# Altium PCB Remote_Control.PcbDoc
Units mm, origin at the board's own origin, x right, y up, seen from the top; angles counter-clockwise.
Board outline 97.54 x 94.25 mm, 2 copper layers (Top Layer, Bottom Layer); 73 components, 70 nets, 292 pads, 193 vias.
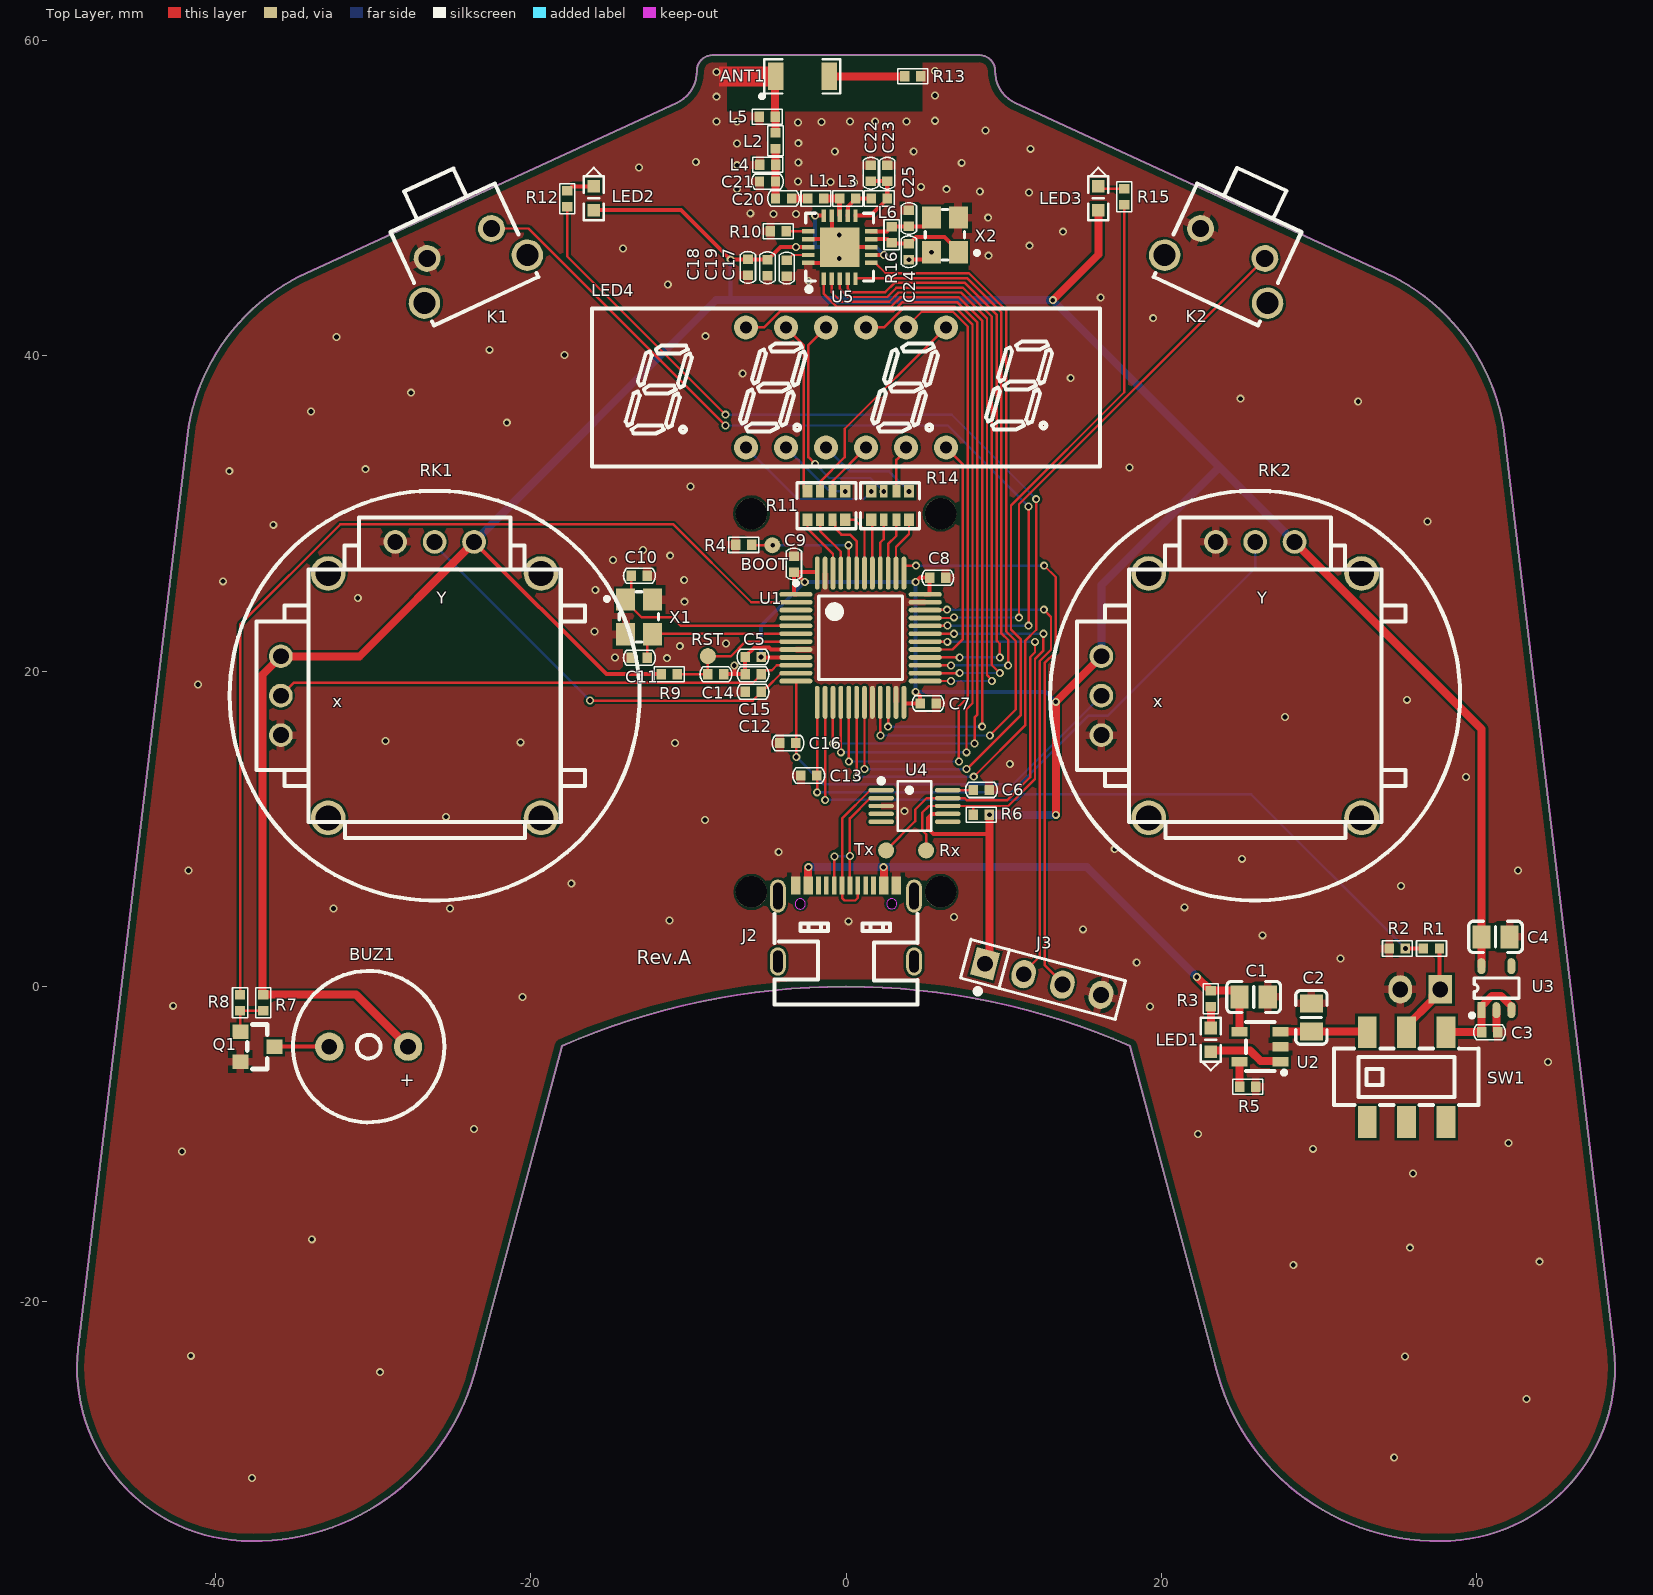
[diagram p0: Top Layer view]
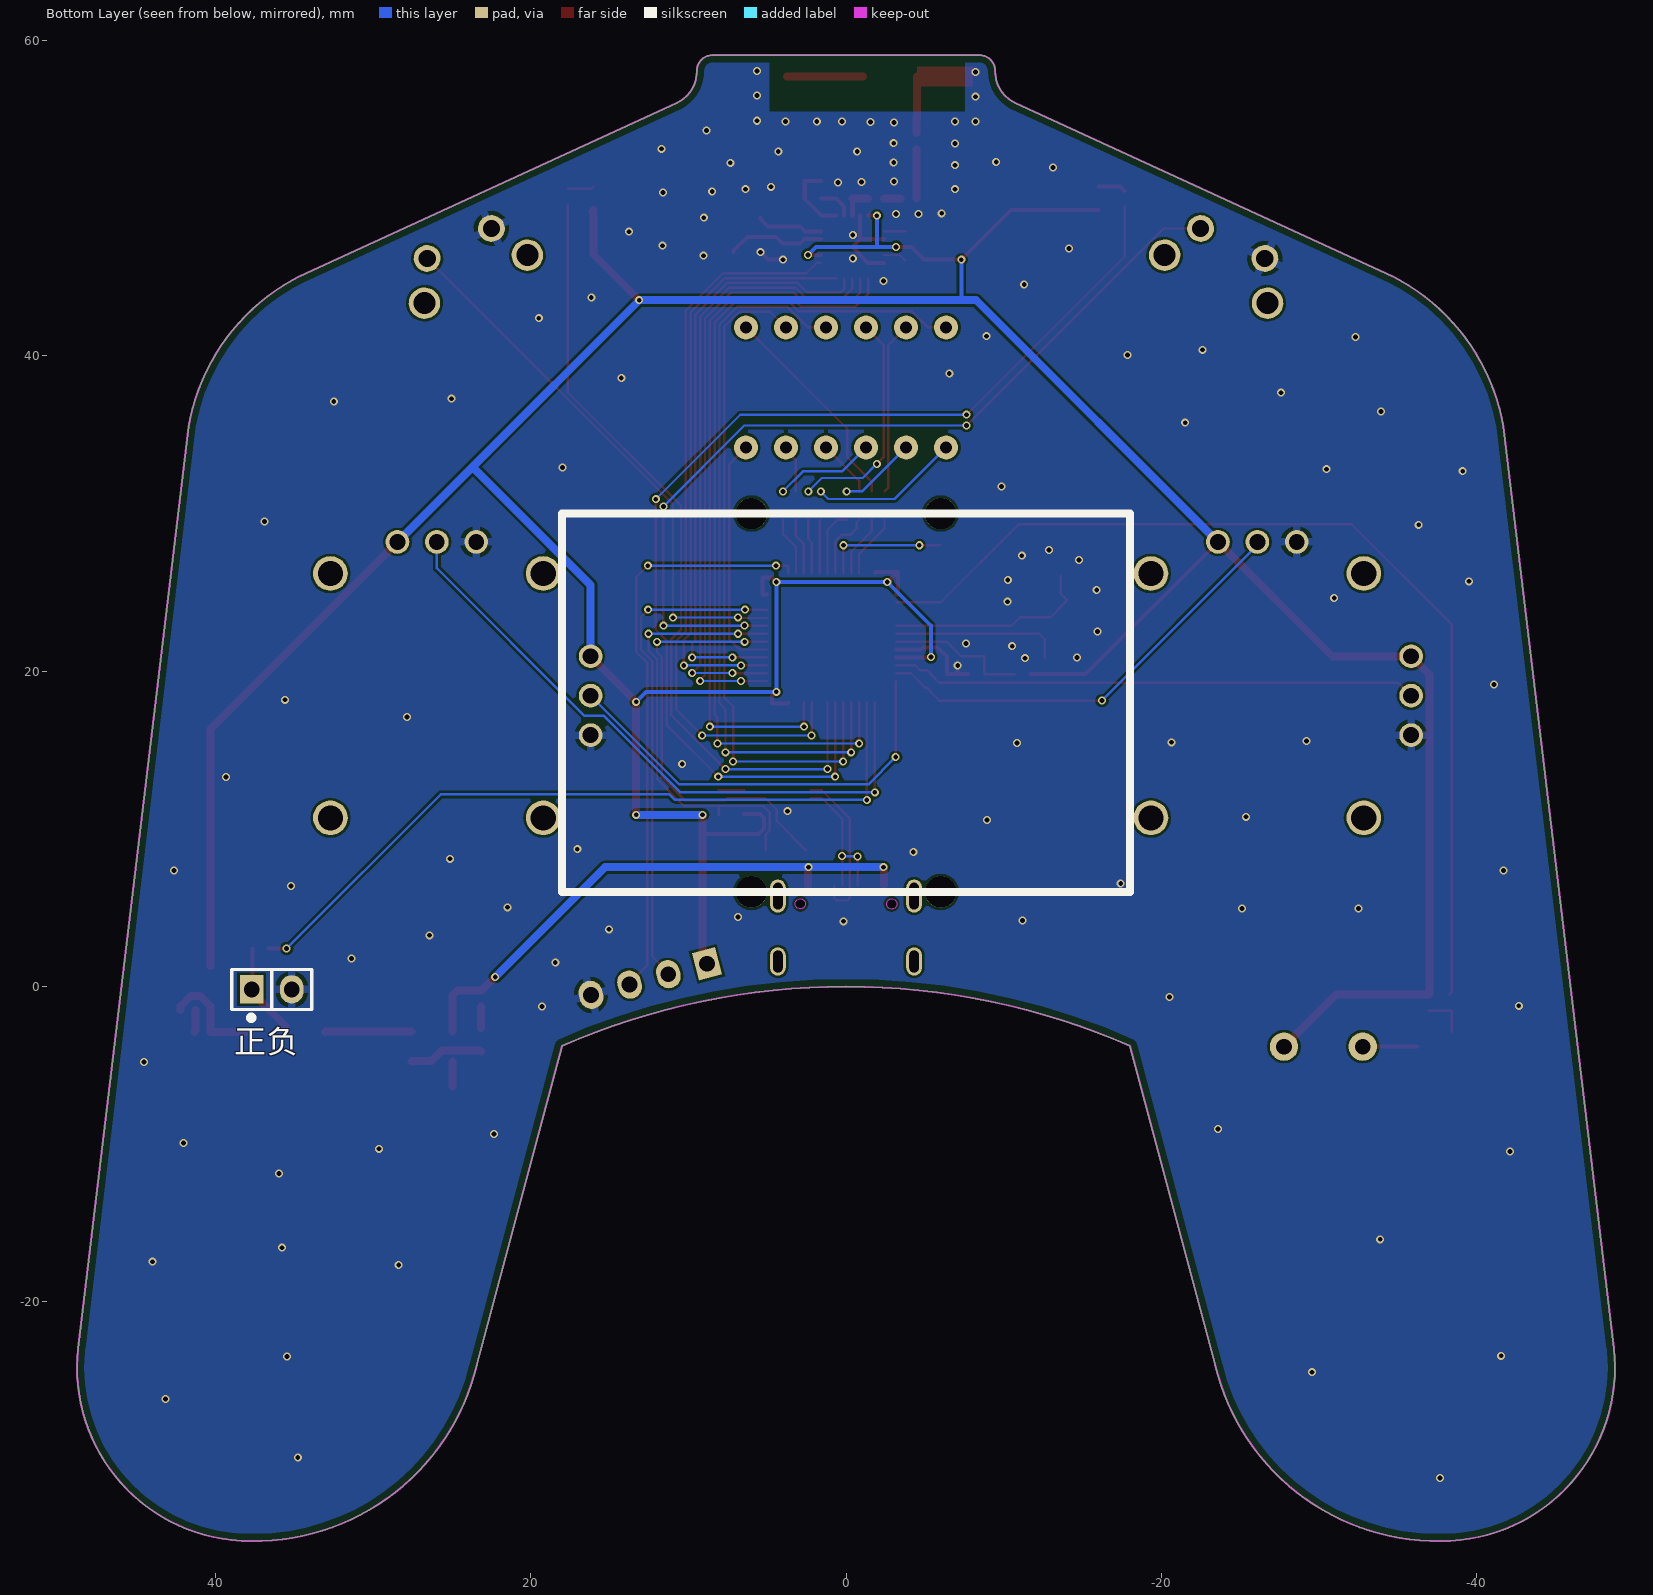
[diagram p1: Bottom Layer view, seen from below]

## Layer stack, top to bottom
Top Solder: solder mask 0.0102, Solder Resist, Dk 3.5
Top Layer: signal copper 0.0356
Dielectric 1: dielectric 0.32, FR-4, Dk 4.8
Bottom Layer: signal copper 0.0356
Bottom Solder: solder mask 0.0102, Solder Resist, Dk 3.5

## Board outline
-48.701,-22.94 ccw(c-37.77,-24.17) -39,-35.1 ccw(c-37.55,-20.65) -23.418,-23.996 -23.419,-23.996 -18.006,-3.759 cw(c0,-45) 0,0 cw(c0,-45) 18.006,-3.759 23.419,-23.996 23.418,-23.996 ccw(c37.55,-20.65) 39,-35.1 ccw(c37.77,-24.17) 48.701,-22.94 41.7,35.5 ccw(c28.65,33.25) 34.631,45.065 34.63,45.062 10.746,56.036 cw(c11.684,58.055) 9.458,58.08 ccw(c8.458,58.08) 8.458,59.08 -8.458,59.08 ccw(c-8.458,58.08) -9.458,58.08 cw(c-11.684,58.055) -10.746,56.036 -34.63,45.062 -34.631,45.065 ccw(c-28.65,33.25) -41.7,35.5

## Design rules (kind name [scope] priority, off if disabled: settings)
Clearance Keep-Out [OnLayer('Keep-Out Layer')] p1: gap=0.4 ignorepadtopadclearanceinfootprint=FALSE except(0: Arc-Hole Track-Hole SMDPad-Hole THPad-Hole Via-Hole Fill-Hole Poly-Hole Region-Hole Text-Hole)
Clearance [All] p2: gap=0.152 ignorepadtopadclearanceinfootprint=FALSE except(0: Arc-Hole Track-Hole SMDPad-Hole THPad-Hole Via-Hole Fill-Hole Poly-Hole Region-Hole Text-Hole)
ComponentClearance [All] p1: gap=0 collisioncheckmode=3 verticalgap=0 showdistances=FALSE
Height [All] p1: minheight=0 maxheight=100 prefheight=12.7
HoleSize [All] p1: absolutevalues=TRUE maxlimit=5.08 minlimit=0.025 maxpercent=80.000 minpercent=20.000
HoleToHoleClearance [All] p1: gap=0 allowstackedmicrovias=TRUE
MinimumSolderMaskSliver [All] p1: minsoldermaskwidth=0
PolygonConnect PolygonConnect_2 [IsVia or  HasPad('R13-2')] p1: connectstyle=Direct reliefconductorwidth=0.254 reliefentries=4 polygonreliefangle="90 Angle" airgapwidth=0.254
PolygonConnect PolygonConnect_1 [All] p2: connectstyle=Relief reliefconductorwidth=0.508 reliefentries=4 polygonreliefangle="90 Angle" airgapwidth=0.254
RoutingVias [All] p1: holewidth=0.305 width=0.508 viastyle="Through Hole" minholewidth=0.305 minwidth=0.406 maxholewidth=0.711 maxwidth=1.27
SilkToSilkClearance [All] p1: silktosilkclearance=0
SilkToSolderMaskClearance [IsPad] p1: minsilkscreentomaskgap=0 clearancetoexposedcopper=TRUE
SolderMaskExpansion [All] p1: expansion=0.102
Width [All] p1: maxlimit=2.54 minlimit=0.152 preferedwidth=0.152
23 further rules are at their usual default settings.

## Components (designator, comment, footprint, x,y, rotation, side; value= is the part's Value field where it differs from the comment)
ANT1 "CrossAir Antenna" ANT-SMD_L3.1-W1.6 -2.769,57.734 r0 top
BOOT "BOOT" PAD-40 -4.674,27.991 r0 top
BUZ1 "BUZZER" BUZ-TH_BD9.6-P5.00-D0.7-FD -30.277,-3.81 r180 top
C1 "10uF" 0805C 25.857,-0.66 r0 top
C2 "10uF" 0805C 29.515,-1.956 r90 top
C3 "104" 0402C 40.818,-2.896 r0 top
C4 "10uF" 0805C 41.199,3.15 r0 top
C5 "104" 0402C -5.893,20.904 r0 top
C6 "104" 0402C 8.585,12.471 r0 top
C7 "104" 0402C 5.207,17.958 r180 top
C8 "104" 0402C 5.817,25.933 r180 top
C9 "104" 0402C -3.302,26.797 r270 top
C10 "20pF" 0402C -13.106,26.06 r180 top
C11 "20pF" 0402C -13.106,20.853 r0 top
C12 "104" 0402C -5.893,18.694 r0 top
C13 "104" 0402C -2.362,13.386 r0 top
C14 "104" 0402C -8.255,19.812 r180 top
C15 "104" 0402C -5.893,19.812 r0 top
C16 "104" 0402C -3.683,15.443 r0 top
C17 "33nF" 0402C -3.759,45.568 r90 top
C18 "10nF" 0402C -6.223,45.618 r270 top
C19 "1nF" 0402C -4.978,45.593 r270 top
C20 "1.5pF" 0402C -3.962,49.987 r180 top
C21 "1.0pF" 0402C -4.978,51.054 r0 top
C22 "2.2nF" 0402C 1.575,51.587 r90 top
C23 "4.7pF" 0402C 2.616,51.587 r90 top
C24 "20pF" 0402C 3.988,46.609 r90 top
C25 "20pF" 0402C 3.988,48.717 r270 top
J2 "Type-C" USB-C-SMD_TYPE-C-16P-1 0,4 r0 top
J3 "CON4" SIP-4-2.54 12.497,0.457 r345 top
K1 "BUTTON" KEY-TH_4P-L7.5-W6.8-P4.50-LS7.2 -24,46 r205 top
K2 "BUTTON" KEY-TH_4P-L7.5-W6.8-P4.50-LS7.2 24,46 r155 top
L1 "3.9nH" 0402R -1.905,49.987 r180 top
L2 "3nH" 0402R -4.47,53.645 r90 top
L3 "8.2nH" 0402R 0.102,49.987 r180 top
L4 "NC" 0402R -4.97,52.121 r0 top
L5 "NC" 0402R -5.004,55.169 r0 top
L6 "2.7nH" 0402R 2.108,49.987 r0 top
LED1 "Red" LED-0603 23.139,-3.378 r270 top value=0603Red,SMD
LED2 "Blue" LED-0603 -16,50 r90 top value=0603Red,SMD
LED3 "Blue" LED-0603 16,50 r90 top value=0603Red,SMD
LED4 "Numerical code tube" 0.28寸四位共阴数码管 0,38 r0 top
Q1 "MMBT3904" SOT-23 -37.338,-3.81 r0 top
R1 "3.6k" 0402R 37.135,2.413 r0 top
R2 "10k" 0402R 34.976,2.413 r0 top
R3 "1k" 0402R 23.139,-0.762 r90 top
R4 "10k" 0402R -6.477,28.016 r180 top
R5 "2k" 0402R 25.476,-6.35 r180 top
R6 "10k" 0402R 8.585,10.897 r0 top
R7 "10k" 0402R -36.957,-1.016 r90 top
R8 "2k" 0402R -38.43,-1.016 r90 top
R9 "10k" 0402R -11.201,19.812 r180 top
R10 "22k" 0402R -4.293,47.904 r0 top
R11 "200" RES-0603-8P -1.245,30.505 r180 top
R12 "200" 0402R -17.678,49.962 r90 top
R13 "0" 0402R 4.242,57.734 r0 top
R14 "200" RES-0603-8P 2.794,30.505 r180 top
R15 "200" 0402R 17.653,50.089 r90 top
R16 "1M" 0402R 2.896,47.676 r90 top
RK1 "ROCKER" ROCKER -35.842,18.45 r0 top
RK2 "ROCKER" ROCKER 16.2,18.45 r0 top
RST "RST" PAD-40 -8.763,20.955 r0 top (schematic designator RST1)
Rx "Rx" PAD-40 5.08,8.636 r0 top
SW1 "MST22D18G2" SW-SMD_MST22D18G2 35.56,-5.74 r0 top
Tx "Tx" PAD-40 2.54,8.636 r0 top
U1 "CH32F203C8T6" LQFP-48_7x7 0.924,22.127 r0 top
U2 "HX4054A" SOT-23-5_L3.0-W1.7-P0.95-LS2.8-BR 26.264,-3.81 r180 top
U3 "XC6204B332MR" SOT-23-5 41.25,-0.102 r0 top
U4 "CH340E" MSOP-10_L3.0-W3.0-P0.50-LS5.0-BL 4.343,11.455 r270 top
U5 "NRF24L01" QFN-20_L4.0-W4.0-P0.50-BL-EP -0.4,46.899 r90 top
X1 "8MHz" OSCCC250X320X80-4N -13.132,23.444 r90 top
X2 "16MHz" OSCCC250X320X80-4N 6.274,47.676 r270 top
正负 "CON2" SIP-2-2.54 36.424,-0.178 r180 bottom (schematic designator J1)

## Footprints (in the part's own frame and the unit in brackets; to place one, negate y for a bottom-side part, rotate by r counter-clockwise, add the part's x,y. Pads: shape width x height; smd on the part's side, far side on the other; paste and mask are expansions set on the pad)
0.28寸四位共阴数码管 [mil]
  round 60 hole 30 mask+2: 1(-250,-150) 2(-150,-150) 3(-50,-150) 4(50,-150) 5(150,-150) 6(250,-150) 7(250,150) 8(150,150) 9(50,150) 10(-50,150) 11(-150,150) 12(-250,150)
  silkscreen extent -634,-197 634,197
0402C [mm]
  rect 0.6x0.65 smd mask+0.025: 1(-0.508,0) 2(0.508,0)
  silkscreen extent -1.01,-0.48 1.01,0.48, body extent -0.51,-0.23 0.49,0.27, height 0.5
0402R [mm]
  rect 0.6x0.65 smd mask+0.025: 1(-0.508,0) 2(0.508,0)
  silkscreen extent -0.95,-0.48 0.95,0.48, body extent -0.47,-0.25 0.53,0.25, height 0.35
0805C [mm]
  rect 1.15x1.45 smd: 1(-0.889,0) 2(0.889,0)
  silkscreen extent -1.7,-0.99 1.7,0.99, body extent -1,-0.63 1,0.63, height 0.78
ANT-SMD_L3.1-W1.6 [mil]
  rect 38.7x68 smd mask+2: 1(-66.6,0) 2(66.6,0)
  silkscreen extent -106,-55 95,43
BUZ-TH_BD9.6-P5.00-D0.7-FD [mm]
  round 1.8 hole 1 mask+0.051: 1(-2.5,0) 2(2.5,0)
  silkscreen extent -4.8,-4.8 4.8,4.8
KEY-TH_4P-L7.5-W6.8-P4.50-LS7.2 [mm]
  round 1.7 hole 1.1 mask+0.051: 1(-2.25,-1.25) 2(2.25,-1.25)
  round 2 hole 1.4 mask+0.051: 3(3.6,1.25) 4(-3.6,1.25)
  silkscreen extent -3.65,-5.71 3.65,2.79
LED-0603 [mm] "20100324  贴片0603LED   LSB"
  rect 0.8x0.8 smd: 1(-0.75,0) 2(0.75,0)
  silkscreen extent -1.4,-0.64 1.93,0.64, body extent -0.8,-0.4 0.8,0.4, height 0.4
LQFP-48_7x7 [mm]
  oval 2.1x0.3 smd: 1(-4.1,2.75) 2(-4.1,2.25) 3(-4.1,1.75) 4(-4.1,1.25) 5(-4.1,0.75) 6(-4.1,0.25) 7(-4.1,-0.25) 8(-4.1,-0.75) 9(-4.1,-1.25) 10(-4.1,-1.75) 11(-4.1,-2.25) 12(-4.1,-2.75) 25(4.1,-2.75) 26(4.1,-2.25) 27(4.1,-1.75) 28(4.1,-1.25) 29(4.1,-0.75) 30(4.1,-0.25) 31(4.1,0.25) 32(4.1,0.75) 33(4.1,1.25) 34(4.1,1.75) 35(4.1,2.25) 36(4.1,2.75)
  oval 0.3x2.1 smd: 13(-2.75,-4.1) 14(-2.25,-4.1) 15(-1.75,-4.1) 16(-1.25,-4.1) 17(-0.75,-4.1) 18(-0.25,-4.1) 19(0.25,-4.1) 20(0.75,-4.1) 21(1.25,-4.1) 22(1.75,-4.1) 23(2.25,-4.1) 24(2.75,-4.1) 37(2.75,4.1) 38(2.25,4.1) 39(1.75,4.1) 40(1.25,4.1) 41(0.75,4.1) 42(0.25,4.1) 43(-0.25,4.1) 44(-0.75,4.1) 45(-1.25,4.1) 46(-1.75,4.1) 47(-2.25,4.1) 48(-2.75,4.1)
  silkscreen extent -4.22,-2.65 2.65,3.57, body extent -3.5,-3.5 3.5,3.5, height 1.6
MSOP-10_L3.0-W3.0-P0.50-LS5.0-BL [mil]
  oval 11x63.8 smd mask+2: 1(-39.4,-83.1) 2(-19.7,-83.1) 3(0,-83.1) 4(19.7,-83.1) 5(39.4,-83.1) 6(39.4,83.1) 7(19.7,83.1) 8(0,83.1) 9(-19.7,83.1) 10(-39.4,83.1)
  silkscreen extent -69,-89 62,42
OSCCC250X320X80-4N [mm]
  rect 1.4x1.2 smd: 1(1.1,0.85) 2(-1.1,0.85) 3(-1.1,-0.85) 4(1.1,-0.85)
  silkscreen extent -1.6,-1.25 1.6,2.16
PAD-40 [mil]
  round 40 smd paste-43.31: 1(0,0)
QFN-20_L4.0-W4.0-P0.50-BL-EP [mil]
  rect 31.5x11 smd mask+2: 1(-78.7,39.4) 2(-78.7,19.7) 3(-78.7,0) 4(-78.7,-19.7) 5(-78.7,-39.4) 11(78.7,-39.4) 12(78.7,-19.7) 13(78.7,0) 14(78.7,19.7) 15(78.7,39.4)
  rect 11x31.5 smd mask+2: 6(-39.4,-78.7) 7(-19.7,-78.7) 8(0,-78.7) 9(19.7,-78.7) 10(39.4,-78.7) 16(39.4,78.7) 17(19.7,78.7) 18(0,78.7) 19(-19.7,78.7) 20(-39.4,78.7)
  rect 98.4x98.4 smd mask+2: 21(0,0)
  silkscreen extent -111,-85 85,85
RES-0603-8P [mm]
  rect 0.65x0.8 smd mask+0.051: 1(-1.2,-0.9) 4(1.2,-0.9) 5(1.2,0.9) 8(-1.2,0.9)
  rect 0.5x0.8 smd mask+0.051: 2(-0.4,-0.9) 3(0.4,-0.9) 6(0.4,0.9) 7(-0.4,0.9)
  silkscreen extent -1.87,-1.45 1.87,1.47
ROCKER [mm]
  round 2.2 hole 1.6: 0(3,-7.75) 0(3,7.75) 0(16.5,-7.75) 0(16.5,7.75)
  round 1.5 hole 1: 1(0,-2.5) 2(0,0) 3(0,2.5) 4(7.25,9.75) 5(9.75,9.75) 6(12.25,9.75)
  silkscreen extent -3.25,-13 22.75,13, body extent -2.68,-12.47 22.32,12.53, height 29.36
SIP-2-2.54 [mm]
  rect 1.5x1.8 hole 1: 1(-1.27,0)
  oval 1.5x1.8 hole 1: 2(1.27,0)
  silkscreen extent -2.54,-1.92 2.54,1.27, body extent -2.54,-1.27 2.54,1.27, height 7.58
SIP-4-2.54 [mm]
  rect 1.5x1.8 hole 1: 1(-3.81,0)
  oval 1.5x1.8 hole 1: 2(-1.27,0) 3(1.27,0) 4(3.81,0)
  silkscreen extent -5.08,-1.92 5.08,1.27, body extent -5.08,-1.27 5.08,1.27, height 7.58
SOT-23 [mil]
  rect 40x36 smd: 1(-42.5,37.4) 2(-42.5,-37.4) 3(42.5,0)
  silkscreen extent -25,-56 25,56, body extent -47,-57 50,58, height 39
SOT-23-5 [mil]
  rect 20x40 smd: 1(-37.4,-55)
  oval 20x40 smd: 2(0,-55) 3(37.4,-55) 4(37.4,55) 5(-37.4,55)
  silkscreen extent -66,-73 57,26, body extent -57,-55 57,55, height 43
SOT-23-5_L3.0-W1.7-P0.95-LS2.8-BR [mm]
  rect 1x0.6 smd mask+0.051: 1(-1.3,0.95) 2(-1.3,0) 3(-1.3,-0.95) 4(1.3,-0.95) 5(1.3,0.95)
  silkscreen extent -1.65,-1.55 0.9,1.78
SW-SMD_MST22D18G2 [mm]
  rect 1.2x2 smd mask+0.051: 1(-2.5,2.85) 2(0,2.85) 3(2.5,2.85) 4(-2.5,-2.85) 5(0,-2.85) 6(2.5,-2.85)
  silkscreen extent -4.6,-1.78 4.57,1.8
USB-C-SMD_TYPE-C-16P-1 [mm]
  rect 0.6x1.15 smd mask+0.05: A1B12(-3.2,2.41) A4B9(-2.4,2.41) B1A12(3.2,2.41) B4A9(2.4,2.41)
  rect 0.3x1.15 smd mask+0.05: A5(-1.25,2.41) A6(-0.25,2.41) A7(0.25,2.41) A8(1.25,2.41) B5(1.75,2.41) B6(0.75,2.41) B7(-0.75,2.41) B8(-1.75,2.41)
  oval 1x1.8 hole 0.6 slot 1.4 at 90 deg mask+0.05: EP(-4.32,-2.41) EP(4.32,-2.41)
  oval 1x2.1 hole 0.6 slot 1.7 at 90 deg mask+0.05: EP(-4.32,1.74) EP(4.32,1.74)
  Keep-Out Layer board cut-out: 3.225,1.25 3.193,1.391 3.103,1.504 2.972,1.567 2.828,1.567 2.697,1.504 2.607,1.391 2.575,1.25 2.575,1.25 2.607,1.109 2.697,0.996 2.828,0.933 2.972,0.933 3.103,0.996 3.193,1.109 3.225,1.25
  Keep-Out Layer board cut-out: -2.575,1.24 -2.607,1.381 -2.697,1.494 -2.828,1.557 -2.972,1.557 -3.103,1.494 -3.193,1.381 -3.225,1.24 -3.225,1.24 -3.193,1.099 -3.103,0.986 -2.972,0.923 -2.828,0.923 -2.697,0.986 -2.607,1.099 -2.575,1.24
  silkscreen extent -4.55,-5.14 4.55,0.59

## Part data
ANT1: library part CON2, "Connector"
BOOT RST Rx Tx: library part TEST-DOT, "测试点"
BUZ1: "蜂鸣器"
C1 C2 C3 C4 C5 C6 C7 C8 C9 C10 C11 C12 C13 C14 C15 C16 C17 C18 C19 C20 C21 C22 C23 C24 C25: "电容"
J3 正负: "Connector"
K1 K2: "按键开关"
L1 L2 L3 L4 L5 L6: "电感"
LED1 LED2 LED3: "发光二极管"
LED4: "四位共阴数码管"
Q1: library part NPN, "NPN三极管"
R1 R2 R3 R4 R5 R6 R7 R8 R9 R10 R12 R13 R15 R16: "电阻"
R11 R14: "排阻"
RK1 RK2: "摇杆电位器"
SW1: "六脚拨动开关", JLCPCB Part Class="Extended Part", LCSC Part Name="两档立式贴片 6脚拨动 柄长2.0MM", Manufacturer="SHOU HAN(首韩)", Add into BOM=yes, Convert to PCB=yes, Datasheet=https://atta.szlcsc.com/upload/public/pdf/source/20190925/C431544_D32DFFD935A96A6C5145903882D4ABA1.pdf, Device=MST22D18G2, Manufacturer Part=MST22D18G2, Name=MST22D18G2, Supplier=LCSC, Supplier Footprint=SMD,3.6x9.1mm, Supplier Part=C431544, Symbol=MST22D18G2
U1: library part STM32F103C, "STM32单片机48引脚"
U2: "锂电池充电芯片"
U3: "LDO, 3.0V输出"
U4: "USB-TTLоƬ"
U5: "2.4G无线通信芯片"
X1 X2: "4pin贴片无源晶振"

## Free pads (board coordinates)
  round 2 hole 2 unplated mask+0.102: 0(-6,6) 0(-6,30) 0(6,6) 0(6,30)

## Via types
v1: diameter 0.508, hole 0.305, Top Layer to Bottom Layer, tented both sides, 192 vias
v2: diameter 0.508, hole 0.305, Top Layer to Bottom Layer, 1 vias

## Nets (pads, with @x,y where several pads share a name; then routed paths per layer and width w, separated by ;. In a path a pad name is that pad's centre, name@x,y a point inside that pad or via, vN(x,y) a via of type N, cw(c..) or ccw(c..) an arc to the next point about the centre after c; other vN are vias at no path point)
3.3V: BUZ1.1 C4.1 C5.2 C7.2 C8.2 C9.2 C18.1 C19.1 J3.1 LED2.1 LED3.1 R6.2 R7.2 R9.2 RK1.3 RK1.6 RK2.3 RK2.6 U1.1 U1.9 U1.24 U1.36 U1.48 U3.5 U4.7 U5.7 U5.15 U5.18 | length 279.3
  Top Layer w0.254: RK1.6 -15.204,19.812 R9.2 ; LED2.1 -10.464,49.25 v1(-7.315,46.101) -7.302,46.114 -6.236,46.114 C18.1 -6.21,46.114 -4.991,46.114 C19.1 -4.953,46.101 -4.155,46.899 U5.18 ; v1(-5.385,20.904) -5.366,20.886 -3.185,20.886 U1.9 ; U1.1 -3.281,24.877 -3.302,24.898 C9.2 C9.2@-3.277,26.289 ; v1(-2.616,25.654) -2.642,25.654 C9.2@-3.277,26.289 ; v1(-1.956,48.895) -1.404,48.895 U5.15 ; U1.48 -1.826,26.268 -1.847,26.289 C9.2@-3.277,26.289 ; U5.7 1.602,46.402 2.409,46.402 v1(2.413,46.406) ; U1.24 3.674,17.979 3.695,17.958 C7.2 4.699,18.415 v1(4.42,18.694) ; v1(4.42,25.654) 4.699,25.933 C8.2 5.309,24.898 5.287,24.877 U1.36 ; U4.7 6.449,10.95 5.464,10.95 5.207,10.693 5.207,10.033 5.563,9.677 9.093,9.677
  Top Layer w0.508: BUZ1.1 -31.079,-0.508 R7.2 -36.999,-0.466 -36.999,19.794 RK1.3 -30.842,20.95 RK1.6 ; J3.1 9.093,1.72 9.093,9.677 v1(9.093,10.897) ; v1(13.114,43.536) 16,46.421 16,49.104 16.068,49.172 16.078,49.172 LED3.1 ; v1(13.31,10.897) v1(13.31,18.06) RK2.3 ; RK2.6 40.31,16.34 C4.1 40.31,1.663 40.3,1.652 U3.5
  Bottom Layer w0.254: -7.315,43.536 v1(-7.315,46.101) ; v1(-5.385,20.904) -5.385,22.885 v1(-2.616,25.654) v1(4.42,25.654) v1(4.42,18.694) 12.675,18.694 v1(13.31,18.06) ; v1(-3.175,46.914) -1.956,46.914 ; v1(-1.956,48.895) -1.956,46.914 ; v1(2.413,46.406) 1.905,46.914 -1.956,46.914
  Bottom Layer w0.508: RK1.6 -8.257,43.536 -7.315,43.536 11.836,43.536 v1(13.114,43.536) 23.689,32.961 ; v1(9.093,10.897) v1(13.31,10.897) ; RK2.3 16.2,25.471 23.689,32.961 ; RK2.6 23.689,32.961
a: LED4.11 R11.4 | length 11
  Top Layer w0.152: LED4.11 -2.692,40.692 -2.692,31.653 R11.4
ADC_BAT: R1.1 R2.2 U1.14 | length 48.3
  Top Layer w0.152: U1.14 -1.321,18.022 v1(-1.321,11.836)
  Top Layer w0.254: v1(35.484,2.413) R1.1
  Bottom Layer w0.152: v1(-1.321,11.836) 10.846,11.836 11.201,12.192 25.705,12.192 v1(35.484,2.413)
ADC_LX: C15.2 RK1.2 U1.10 | length 33.5
  Top Layer w0.152: RK1.2 -35.034,19.258 -5.913,19.258 -5.385,19.787 C15.2 -5.385,19.837 -5.161,20.061 -4.704,20.061 -4.388,20.377 U1.10
ADC_LY: C12.2 RK1.5 U1.11 | length 28
  Top Layer w0.152: v1(-16.236,18.141) -5.913,18.141 -5.385,18.669 C12.2 -5.385,18.719 -5.161,18.943 -5.045,18.943 -4.111,19.877 U1.11
  Bottom Layer w0.152: RK1.5 -26.092,27.997 v1(-16.236,18.141)
ADC_RX: C16.2 RK2.2 U1.12 | length 27.3
  Top Layer w0.152: U1.12 -3.2,19.352 -3.193,19.352 -3.15,19.309 -3.15,15.443 v1(-3.15,14.554)
  Bottom Layer w0.152: v1(-3.15,14.554) -1.422,12.827 10.577,12.827 RK2.2
ADC_RY: C13.2 RK2.5 U1.13 | length 41
  Top Layer w0.152: v1(-1.829,12.319) -1.827,12.32 -1.827,13.386 -1.827,18.025 U1.13
  Bottom Layer w0.152: v1(-1.829,12.319) 10.5,12.319 15.351,17.17 16.586,17.17 25.95,26.534 RK2.5
b: LED4.7 R11.3 | length 13.7
  Top Layer w0.152: R11.3 -1.645,32.01 -0.076,33.579 -0.076,35.384 LED4.7
BOOT: BOOT.1 R4.1 U1.44 | length 7.9
  Top Layer w0.152: R4.1 -5.944,27.991 BOOT.1 BOOT.1@-4.661,28.003 ; BOOT.1@-4.661,27.978 v1(-4.648,27.991) ; v1(0.152,27.991) 0.163,27.98 0.163,26.238 U1.44
  Bottom Layer w0.152: v1(-4.648,27.991) v1(0.152,27.991)
BUZZER: R8.2 U1.2 | length 63.5
  Top Layer w0.152: R8.2@-38.278,-0.508 -38.43,-0.356 -38.43,22.962 -32.08,29.312 -10.947,29.312 -6.013,24.377 -3.574,24.377 -3.556,24.359 -3.538,24.377 U1.2
c: LED4.4 R11.2 | length 3.7
  Top Layer w0.152: R11.2 -0.845,32.075 LED4.4
d: LED4.2 R11.1 | length 4.9
  Bottom Layer w0.152: LED4.2 -1.025,31.405 v1(-0.045,31.405)
dp: LED4.3 R14.1 | length 6.4
  Bottom Layer w0.152: LED4.3 0.246,32.674 2.734,32.674 3.994,31.414 v1(3.994,31.405)
e: LED4.1 R14.4 | length 9.5
  Bottom Layer w0.152: LED4.1 -3.083,30.923 1.129,30.923 v1(1.6,31.394)
f: LED4.10 R14.3 | length 14.4
  Top Layer w0.152: v1(-1.956,33.147) -2.388,33.579 -2.388,40.692 LED4.10
  Bottom Layer w0.152: v1@-1.943,33.134 -1.067,32.258 1.541,32.258 v1(2.394,31.405)
g: LED4.5 R14.2 | length 3
  Top Layer w0.152: R14.2 3.194,33.405 3.81,34.021 LED4.5
GND: ANT1.1 C1.2 C2.2 C3.2 C4.2 C5.1 C6.2 C7.1 C8.1 C9.1 C10.1 C11.1 C12.1 C13.1 C14.1 C15.1 C16.1 C17.1 C18.2 C19.2 C21.1 C22.2 C23.2 C24.1 C25.1 J2.A1B12 J2.B1A12 J3.4 K1.2 K2.2 L2.2 L4.1 L5.1 L5.2 Q1.2 R2.1 R4.2 R5.1 R10.1 R13.2 RK1.1 RK1.4 RK2.1 RK2.4 U1.8 U1.20 U1.23 U1.35 U1.47 U2.2 U3.2 U4.3 U5.8 U5.14 U5.17 U5.20 U5.21 X1.2 X1.4 X2.2 X2.4 正负.2 | length 21.3
  Top Layer w0.254: C14.1 -7.074,19.812 ; v1(-7.087,20.371) -7.074,20.358 -7.074,19.812 ; U1.8 -4.749,21.377 -4.886,21.514 -5.816,21.514 -6.401,20.929 C5.1 C15.1 -7.074,19.812 ; U5.20 -1.401,45.898 U5.21 ; U5.17 U5.21@-0.901,47.399 ; U5.14 U5.21@-0.901,47.399 ; U5.8 U5.21 ; v1(3.988,46.101) 4.951,46.101 v1(5.424,46.576) v1(5.424,46.576) ; U5.21@-0.901,47.399 U5.21
  Top Layer w0.508: ANT1.1@-4.491,57.734 -4.491,55.174 L5.2 -4.483,55.156 -4.483,54.165 L2.2 ; U3.2 41.25,-2.794 41.326,-2.871 C3.2
  other v1: -37.668,-31.166 34.773,-29.87 43.155,-26.162 -29.566,-24.46 35.458,-23.47 -41.554,-23.419 28.372,-17.653 43.993,-17.45 35.763,-16.561 -33.884,-16.027 35.966,-11.862 -42.113,-10.465 29.616,-10.287 42.012,-9.931 22.327,-9.347 -23.597,-9.042 44.526,-4.775 19.279,-1.27 -42.672,-1.219 -20.523,-0.66 18.44,1.524 31.369,1.778 26.416,3.251 15.037,3.632 0.152,4.14 -11.201,4.191 6.858,4.42 -32.512,4.953 -25.121,4.953 21.463,5.029 35.204,6.375 -17.424,6.528 -41.707,7.366 42.621,7.366 25.121,8.103 -4.267,8.534 17.043,8.712 -8.941,10.566 -25.375,10.77 3.708,11.125 39.319,13.284 10.389,14.122 -10.846,15.443 -20.65,15.494 -29.21,15.57 27.838,17.094 35.585,18.186 -41.097,19.152 -11.354,20.828 -14.656,20.879 -10.541,21.59 -7.62,21.768 -15.951,22.53 -10.236,24.409 -30.963,24.638 -15.9,25.146 -39.522,25.705 -10.262,25.781 -14.783,27.051 -11.151,27.33 -12.878,27.686 -36.322,29.286 36.881,29.489 -39.116,32.69 -30.48,32.817 17.983,32.918 -21.514,35.763 -33.934,36.474 32.487,37.109 25.019,37.287 -27.584,37.668 14.249,38.608 -6.553,38.887 -17.856,40.056 -22.606,40.386 -32.309,41.199 -8.915,41.25 19.482,42.393 16.154,43.713 -11.303,44.526 -2.388,44.755 -0.432,46.177 9.042,46.355 -14.148,46.812 11.633,46.99 -0.432,47.676 13.767,47.879 9.017,48.768 -4.597,48.997 -3.175,48.997 -6.071,49.047 11.608,50.368 8.484,50.419 -6.909,50.571 6.375,50.571 4.75,50.724 0.508,51.003 -0.991,51.029 -3.048,51.054 -13.132,51.943 -6.909,52.095 7.341,52.248 -3.023,52.273 -9.525,52.299 -0.711,52.959 4.293,52.959 11.709,53.137 -6.909,53.467 -3.023,53.492 8.839,54.305 -3.048,54.813 -1.549,54.839 -8.204,54.864 -6.909,54.864 0.254,54.864 1.854,54.864 3.835,54.864 5.639,54.915 -8.204,56.439 5.639,56.515 -8.204,58.014 5.639,58.064
  other v2: -9.855,31.725
KEY_L: K1.1 U1.32 | length 55.5
  Top Layer w0.152: K1.1 -20.144,48.084 v1(-7.645,35.585) ; U1.32 5.041,22.894 v1(6.435,22.894) ; v1(11.582,22.885) v1(11.582,30.455)
  Bottom Layer w0.152: v1(-7.645,35.585) 6.452,35.585 v1(11.582,30.455) ; v1(6.435,22.894) 6.439,22.89 11.578,22.89 v1(11.582,22.885)
KEY_R: K2.1 U1.33 | length 35.2
  Top Layer w0.152: U1.33 6.816,23.376 v1(6.858,23.419) ; v1(10.973,23.393) 10.973,30.587 K2.1
  Bottom Layer w0.152: v1(6.858,23.419) 6.871,23.406 10.96,23.406 v1(10.973,23.393)
LED_L: R12.1 U1.18 | length 70.7
  Top Layer w0.152: R12.1 -17.678,46.304 v1(-7.645,36.271) ; U1.18 0.68,18.021 0.68,13.315 v1(0.686,13.31) ; v1(8.103,13.31) 11.379,16.586 11.379,21.946 12.065,22.631 v1(12.065,30.912)
  Bottom Layer w0.152: v1(-7.645,36.271) 6.706,36.271 v1(12.065,30.912) ; v1(0.686,13.31) v1(8.103,13.31)
LED_R: R15.1 U1.19 | length 51.2
  Top Layer w0.152: v1(1.168,13.792) 1.171,13.795 1.171,18.024 U1.19 ; v1(7.635,13.802) 7.677,13.802 11.074,17.199 11.074,22.046 10.465,22.655 10.465,30.51 17.653,37.699 R15.1
  Bottom Layer w0.152: v1(1.168,13.792) 7.625,13.792 v1(7.635,13.802)
NetANT1_2: ANT1.2 R13.1 | length 4.8
  Top Layer w0.508: ANT1.2 R13.1
NetBUZ1_2: BUZ1.2 Q1.3 | length 3.5
  Top Layer w0.254: Q1.3 BUZ1.2
NetC2_1: C2.1 SW1.1 U2.3 | length 5.5
  Top Layer w0.508: U2.3 27.571,-2.852 29.507,-2.852 C2.1 33.015,-2.845 SW1.1
NetC3_1: C3.1 SW1.3 U3.1 U3.3 | length 6.6
  Top Layer w0.508: SW1.3 38.065,-2.896 C3.1 40.3,-2.885 U3.1 40.3,-1.245 40.96,-0.584 41.539,-0.584 42.2,-1.245 U3.3
NetC6_1: C6.1 U4.10 | length 1.6
  Top Layer w0.152: U4.10 8.062,12.456 C6.1
NetC17_2: C17.2 U5.19 | length 1.5
  Top Layer w0.152: C17.2 -3.734,46.076 -3.411,46.399 U5.19
NetC20_1: C20.1 L1.2 | length 1
  Top Layer w0.508: C20.1 L1.2
NetC20_2: C20.2 C21.2 L2.1 L4.2 | length 3.2
  Top Layer w0.508: C20.2 C21.2 -4.466,51.058 -4.466,52.117 L4.2 -4.466,52.125 -4.466,53.133 L2.1
NetC22_1: C22.1 C23.1 L6.2 U5.11 | length 4.6
  Top Layer w0.254: U5.11 1.552,48.898 2.616,49.962 L6.2 C23.1 C22.1
NetC24_2: C24.2 R16.1 U5.9 X2.1 | length 6.3
  Top Layer w0.254: U5.9 2.639,47.399 2.871,47.168 R16.1 2.921,47.142 3.962,47.142 C24.2 4.013,47.117 4.451,47.555 6.244,47.555 7.124,46.676 X2.1
NetC25_2: C25.2 R16.2 U5.10 X2.3 | length 4.2
  Top Layer w0.254: U5.10 2.587,47.9 2.871,48.184 R16.2 2.908,48.197 3.975,48.197 C25.2 4.951,48.209 5.424,48.682 X2.3
NetL1_1: L1.1 L3.2 U5.13 | length 2.1
  Top Layer w0.305: L3.2 -0.403,49.984 -0.403,48.901 U5.13
  Top Layer w0.508: L1.1 L3.2
NetL3_1: L3.1 L6.1 U5.12 | length 2.3
  Top Layer w0.254: U5.12 0.113,48.911 0.113,49.465 0.61,49.962 L3.1 L6.1
NetLED1_1: LED1.1 R3.1 | length 1.4
  Top Layer w0.508: LED1.1 R3.1
NetLED1_2: LED1.2 U2.1 | length 4.7
  Top Layer w0.508: LED1.2 23.214,-4.054 25.632,-4.054 26.302,-4.723 27.527,-4.723 U2.1
NetLED2_2: LED2.2 R12.2 | length 1.8
  Top Layer w0.254: R12.2 -17.653,50.47 -17.373,50.75 LED2.2
NetLED3_2: LED3.2 R15.2 | length 1.7
  Top Layer w0.152: LED3.2 16.153,50.597 R15.2
NetQ1_1: Q1.1 R7.1 R8.1 | length 2.8
  Top Layer w0.152: Q1.1 -38.43,-2.847 R8.1 R7.1
NetR5_2: R5.2 U2.5 | length 1.6
  Top Layer w0.508: U2.5 24.966,-4.762 24.966,-6.348 R5.2
NetR10_2: R10.2 U5.16 | length 1.4
  Top Layer w0.152: R10.2 -3.78,47.9 U5.16
NRF_CE: U1.22 U5.1 | length 45.5
  Top Layer w0.152: U5.1 -1.401,43.928 -0.602,43.129 2.866,43.129 3.452,43.715 7.159,43.715 8.636,42.238 v1(8.636,16.485) ; v1(2.667,16.485) 2.671,16.488 2.671,18.023 U1.22
  Bottom Layer w0.152: v1(2.667,16.485) v1(8.636,16.485)
NRF_IRQ: U1.21 U5.6 | length 46.7
  Top Layer w0.152: U5.6 1.859,45.898 2.518,45.239 7.791,45.239 10.16,42.87 10.16,22.529 10.77,21.919 10.77,17.577 v1(9.119,15.926) ; U1.21 2.179,18.022 2.179,15.931 v1(2.184,15.926)
  Bottom Layer w0.152: v1(2.184,15.926) v1(9.119,15.926)
nRST: C14.2 R9.1 RST.1 U1.7 | length 9
  Top Layer w0.152: R9.1 C14.2 RST.1 -7.298,20.955 -6.376,21.877 U1.7
SMG_a: R11.5 U1.46 | length 4
  Top Layer w0.152: R11.5 -2.444,29.064 -0.826,27.445 U1.46
SMG_b: R11.6 U1.45 | length 3.9
  Top Layer w0.152: R11.6 -1.645,28.899 -0.326,27.58 U1.45
SMG_c: R11.7 U1.43 | length 4.3
  Top Layer w0.152: R11.7 -0.671,29.432 -0.671,29.043 -0.296,28.667 0.263,28.667 0.674,28.257 U1.43
SMG_d: R11.8 U1.42 | length 4.2
  Top Layer w0.152: R11.8 0.546,29.605 1.174,28.977 U1.42
SMG_dp: R14.8 U1.38 | length 3.7
  Top Layer w0.152: U1.38 3.174,27.888 3.994,28.708 R14.8
SMG_e: R14.5 U1.41 | length 3.4
  Top Layer w0.152: R14.5 1.674,29.525 U1.41
SMG_f: R14.6 U1.40 | length 3.5
  Top Layer w0.152: U1.40 2.174,28.158 2.394,28.378 R14.6
SMG_g: R14.7 U1.39 | length 3.6
  Top Layer w0.152: U1.39 2.674,28.074 3.194,28.594 R14.7
SMG_G1: LED4.12 U1.15 | length 54.3
  Top Layer w0.152: LED4.12 -5.211,41.81 -4.197,42.824 2.992,42.824 3.578,43.41 7.033,43.41 8.331,42.112 8.331,17.247 8.153,17.069 v1(8.153,15.418) ; v1@-0.832,15.418 -0.832,18.021 U1.15
  Bottom Layer w0.152: v1(-0.838,15.418) v1(8.153,15.418)
SMG_G2: LED4.9 U1.16 | length 46.2
  Top Layer w0.152: v1(-0.33,14.859) -0.328,14.861 -0.328,18.025 U1.16 ; LED4.9 2.409,41.81 3.704,43.105 6.906,43.105 8.026,41.985 8.026,17.97 7.645,17.589 v1(7.645,14.859)
  Bottom Layer w0.152: v1(-0.33,14.859) v1(7.645,14.859)
SMG_G3: LED4.8 U1.17 | length 43.3
  Top Layer w0.152: U1.17 0.176,18.025 0.176,14.277 v1(0.178,14.275) ; LED4.8 4.801,42.801 6.78,42.801 7.722,41.859 7.722,18.339 7.163,17.78 v1(7.163,14.275)
  Bottom Layer w0.152: v1(0.178,14.275) v1(7.163,14.275)
SMG_G4: LED4.6 U1.29 | length 15.3
  Top Layer w0.152: U1.29 6.746,21.377 7.417,22.047 7.417,33.123 LED4.6
SPI_MISO: U1.27 U5.5 | length 38
  Top Layer w0.152: U5.5 0.635,44.934 7.665,44.934 9.855,42.744 9.855,22.403 10.287,21.971 v1(10.287,20.371) ; U1.27 5.027,20.374 6.652,20.374 v1(6.655,20.371)
  Bottom Layer w0.152: v1(6.655,20.371) v1(10.287,20.371)
SPI_MOSI: U1.28 U5.4 | length 37.8
  Top Layer w0.152: U5.4 0.1,44.271 0.328,44.044 2.487,44.044 3.073,44.629 7.538,44.629 9.55,42.617 9.55,21.946 9.754,21.742 v1(9.754,20.879) ; U1.28 7.212,20.877 v1(7.214,20.879)
  Bottom Layer w0.152: v1(7.214,20.879) v1(9.754,20.879)
SPI_NSS: U1.25 U5.2 | length 39.2
  Top Layer w0.152: U5.2 -0.901,44.03 -0.305,43.434 2.74,43.434 3.326,44.02 7.285,44.02 8.941,42.364 8.941,19.758 9.246,19.453 v1(9.246,19.38) ; U1.25 5.026,19.379 6.653,19.379 v1(6.655,19.38)
  Bottom Layer w0.152: v1(6.655,19.38) v1(9.246,19.38)
SPI_SCK: U1.26 U5.3 | length 39
  Top Layer w0.152: U5.3 -0.4,44.271 0.132,43.739 2.614,43.739 3.199,44.325 7.411,44.325 9.246,42.49 9.246,20.396 v1(9.754,19.888) ; U1.26 5.03,19.883 7.208,19.883 v1(7.214,19.888)
  Bottom Layer w0.152: v1(7.214,19.888) v1(9.754,19.888)
SWD_CLK: J3.3 U1.37 | length 37
  Top Layer w0.152: U1.37 3.674,26.627 3.742,26.695 v1(4.445,26.695) ; v1(12.573,26.695) 13.31,25.959 13.31,21.236 12.598,20.525 12.598,1.36 13.724,0.235 J3.3
  Bottom Layer w0.152: v1(4.445,26.695) v1(12.573,26.695)
SWD_IO: J3.2 U1.34 | length 31.6
  Top Layer w0.152: U1.34 5.036,23.889 6.389,23.889 v1(6.401,23.901) ; J3.2 11.27,0.892 12.294,1.915 12.294,20.651 13.005,21.362 13.005,23.444 v1(12.548,23.901)
  Bottom Layer w0.152: v1(6.401,23.901) v1(12.548,23.901)
UART_RX: R6.1 Rx.1 U1.31 U4.8 | length 28.1
  Top Layer w0.152: U1.31 v1(6.858,22.377) ; Rx.1 5.08,9.657 4.826,9.911 4.826,11.024 5.258,11.455 U4.8 8.103,11.455 ; R6.1@8.052,10.998 R6.1@8.052,11.023 ; R6.1 8.077,11.43 8.103,11.455 ; v1(12.522,22.377) 12.522,21.311 11.989,20.777 11.989,13.158 10.286,11.455 8.103,11.455
  Bottom Layer w0.152: v1(6.858,22.377) v1(12.522,22.377)
UART_TX: Tx.1 U1.30 U4.9 | length 27.3
  Top Layer w0.152: Tx.1 4.394,10.49 4.394,11.227 5.123,11.956 U4.9 7.526,11.956 7.671,11.811 10.211,11.811 11.684,13.284 11.684,20.903 11.989,21.208 v1(11.989,21.869) ; U1.30 5.028,21.873 6.422,21.873 v1(6.426,21.869)
  Bottom Layer w0.152: v1(6.426,21.869) v1(11.989,21.869)
USB_DN: J2.A7 J2.B7 U4.2 | length 9.6
  Top Layer w0.152: J2.B7 -0.743,6.417 -0.743,8.248 v1(-0.737,8.255) ; J2.A7 0.25,10.664 1.542,11.956 U4.2
  Bottom Layer w0.152: v1(-0.737,8.255) 0.229,8.255 v1(0.254,8.28)
USB_DP: J2.A6 J2.B6 U4.1 | length 10.2
  Top Layer w0.152: J2.B6 0.75,5.627 0.584,5.461 -0.102,5.461 -0.25,5.609 J2.A6 -0.25,10.665 1.542,12.456 U4.1
VBAT: R1.2 SW1.2 正负.1 | length 6.2
  Top Layer w0.254: 正负.1@37.643,-0.127 R1.2
  Top Layer w0.508: SW1.2 35.56,-2.49 37.198,-0.853 37.198,-0.572 正负.1@37.643,-0.127
VUSB: C1.1 J2.A4B9 J2.B4A9 R3.2 U2.4 | length 35.3
  Top Layer w0.508: J2.A4B9 -2.4,7.557 v1(-2.388,7.569) ; v1(2.388,7.569) 2.4,7.557 J2.B4A9 ; v1(22.25,0.61) 23.114,-0.254 R3.2 24.647,-0.254 24.968,-0.575 24.966,-0.577 24.966,-2.858 U2.4
  Bottom Layer w0.508: v1(-2.388,7.569) v1(2.388,7.569) 15.291,7.569 v1(22.25,0.61)
XTAL_IN: C10.2 U1.5 X1.1 | length 13.2
  Top Layer w0.152: C10.2 -13.614,24.912 X1.1 -13.982,24.444 -12.956,23.419 -11.024,23.419 -10.482,22.877 U1.5
XTAL_OUT: C11.2 U1.6 X1.3 | length 10.7
  Top Layer w0.152: C11.2 -12.598,22.028 X1.3 -12.249,22.377 U1.6
pads on no net: J2.A5 J2.A8 J2.B5 J2.B8 J2.EP K1.3 K1.4 K2.3 K2.4 RK1.0 RK2.0 SW1.4 SW1.5 SW1.6 U1.3 U1.4 U3.4 U4.4 U4.5 U4.6

## Polygon pours and split planes (outlines as drawn)
GND on Top Layer (solid, remove dead copper, pour order 0): -50.394,60.681 -50.19,60.477 50.14,60.477 50.14,-36.068 49.632,-36.576 -50.495,-36.576
GND on Bottom Layer (solid, remove dead copper, pour order 2): -49.606,59.868 49.733,59.868 49.86,59.995 49.86,-35.89 -49.428,-35.89 -49.708,-36.17

## Keep-outs
Keep-Out Layer:
  lines w0.127: -34.631,45.065 ccw(c-28.65,33.25) -41.7,35.5 -48.701,-22.94 ccw(c-37.77,-24.17) -39,-35.1 ccw(c-37.55,-20.65) -23.418,-23.996 ; -34.63,45.062 -10.746,56.036 ccw(c-11.684,58.055) -9.458,58.08 cw(c-8.458,58.08) -8.458,59.08 0,59.08 8.458,59.08 cw(c8.458,58.08) 9.458,58.08 ccw(c11.684,58.055) 10.746,56.036 ; -23.419,-23.996 -18.006,-3.759 cw(c0,-45) 0,0 cw(c0,-45) 18.006,-3.759 23.419,-23.996 ccw(c37.55,-20.65) 39,-35.1 ccw(c37.77,-24.17) 48.701,-22.94 41.7,35.5 ccw(c28.65,33.25) 34.631,45.065 ; 10.746,56.036 34.63,45.062

## Other copper
Top Layer:
  rectangle net GND: -8.052,57.099 -4.496,58.369
  pour cut-out: -5.034,50.521 -3.859,50.521 -3.859,55.499 -5.034,55.499
Multi-Layer:
  pour cut-out: 4.877,59.08 -7.569,59.08 -7.569,55.501 4.877,55.501

## Silkscreen, mask and mechanical layers (free items; w line width, h text height)
Top Overlay:
  text "Rev.A" at -13.259,1.092 h1.52
Bottom Overlay:
  lines w0.508: -18,6 18,6 18,30 -18,30 -18,6
Mechanical 1:
  lines w0.127: -34.631,45.065 ccw(c-28.65,33.25) -41.7,35.5 -48.701,-22.94 ccw(c-37.77,-24.17) -39,-35.1 ccw(c-37.55,-20.65) -23.418,-23.996 ; -34.63,45.062 -10.746,56.036 ccw(c-11.684,58.055) -9.458,58.08 cw(c-8.458,58.08) -8.458,59.08 0,59.08 8.458,59.08 cw(c8.458,58.08) 9.458,58.08 ccw(c11.684,58.055) 10.746,56.036 ; -23.419,-23.996 -18.006,-3.759 cw(c0,-45) 0,0 cw(c0,-45) 18.006,-3.759 23.419,-23.996 ccw(c37.55,-20.65) 39,-35.1 ccw(c37.77,-24.17) 48.701,-22.94 41.7,35.5 ccw(c28.65,33.25) 34.631,45.065 ; 10.746,56.036 34.63,45.062
Mechanical 6:
  circle w0.127: c26,18.5 r17.5
  circle w0.127: c-26,18.5 r17.5
Drill Drawing:
  text ".Legend" at 56.863,0.251 h1.52

## Text inside footprints (layer, text, board x,y; h text height)
BUZ1: Top Overlay "+" at -27.347,-5.598 h0.83 r180
RK1: Top Overlay "x" at -31.96,17.713 h0.76; Top Overlay "Y" at -25.33,24.292 h0.76
RK2: Top Overlay "x" at 20.083,17.713 h0.76; Top Overlay "Y" at 26.712,24.292 h0.76